# Altium PCB WG-JW-MB V1.0.PcbDoc
Units mil, origin at the board's own origin, x right, y up, seen from the top; angles counter-clockwise.
Board outline 3784.52 x 3519.17 mil, 4 copper layers (Top Layer, VCC, GND, Bottom Layer); 88 components, 55 nets, 282 pads, 98 vias.
Unrouted connection lines stored in the file: 1.
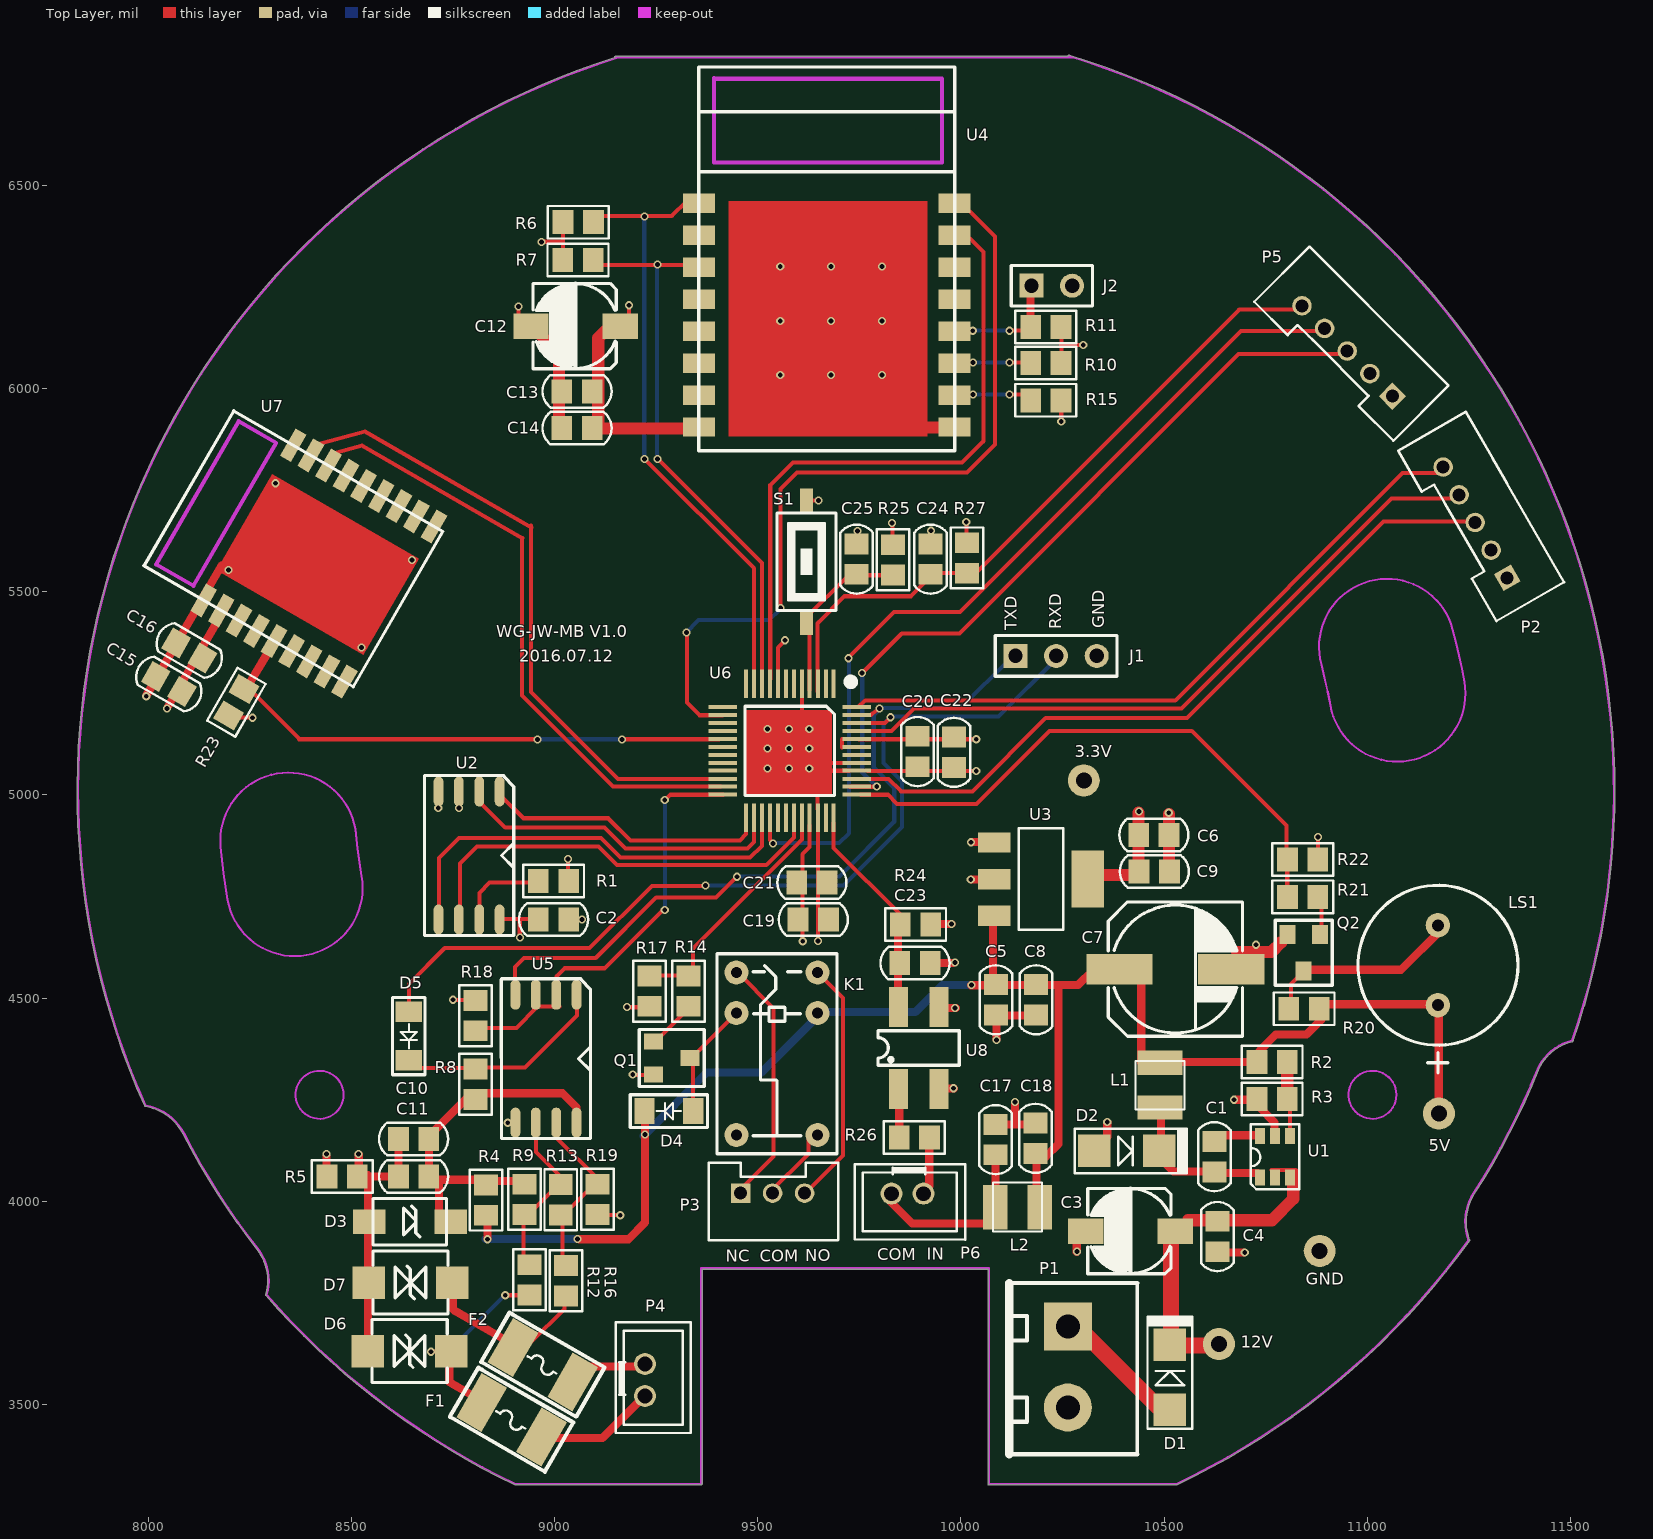
[diagram p0: Top Layer view]
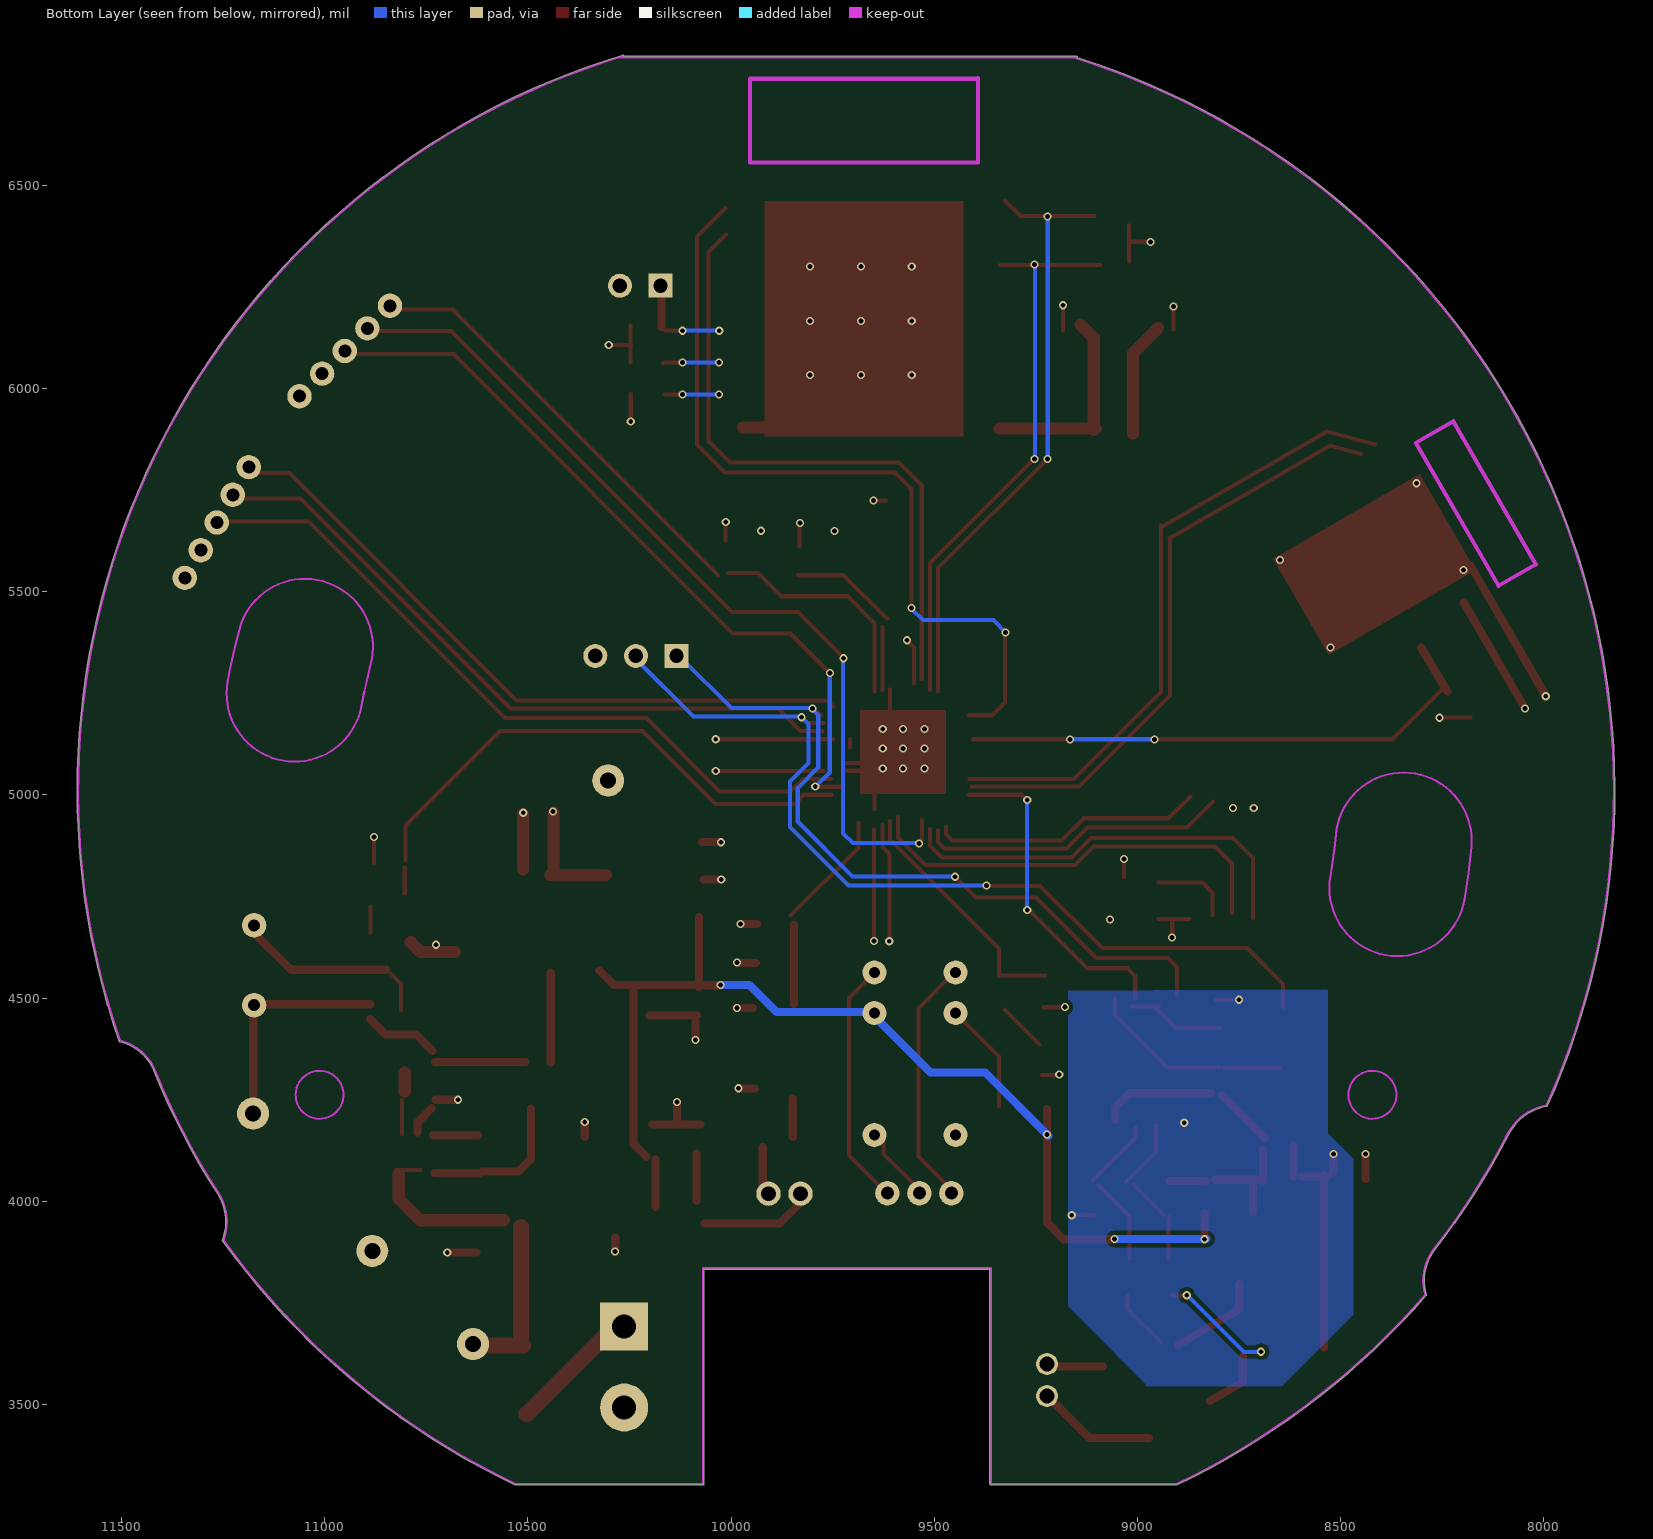
[diagram p1: Bottom Layer view, seen from below]
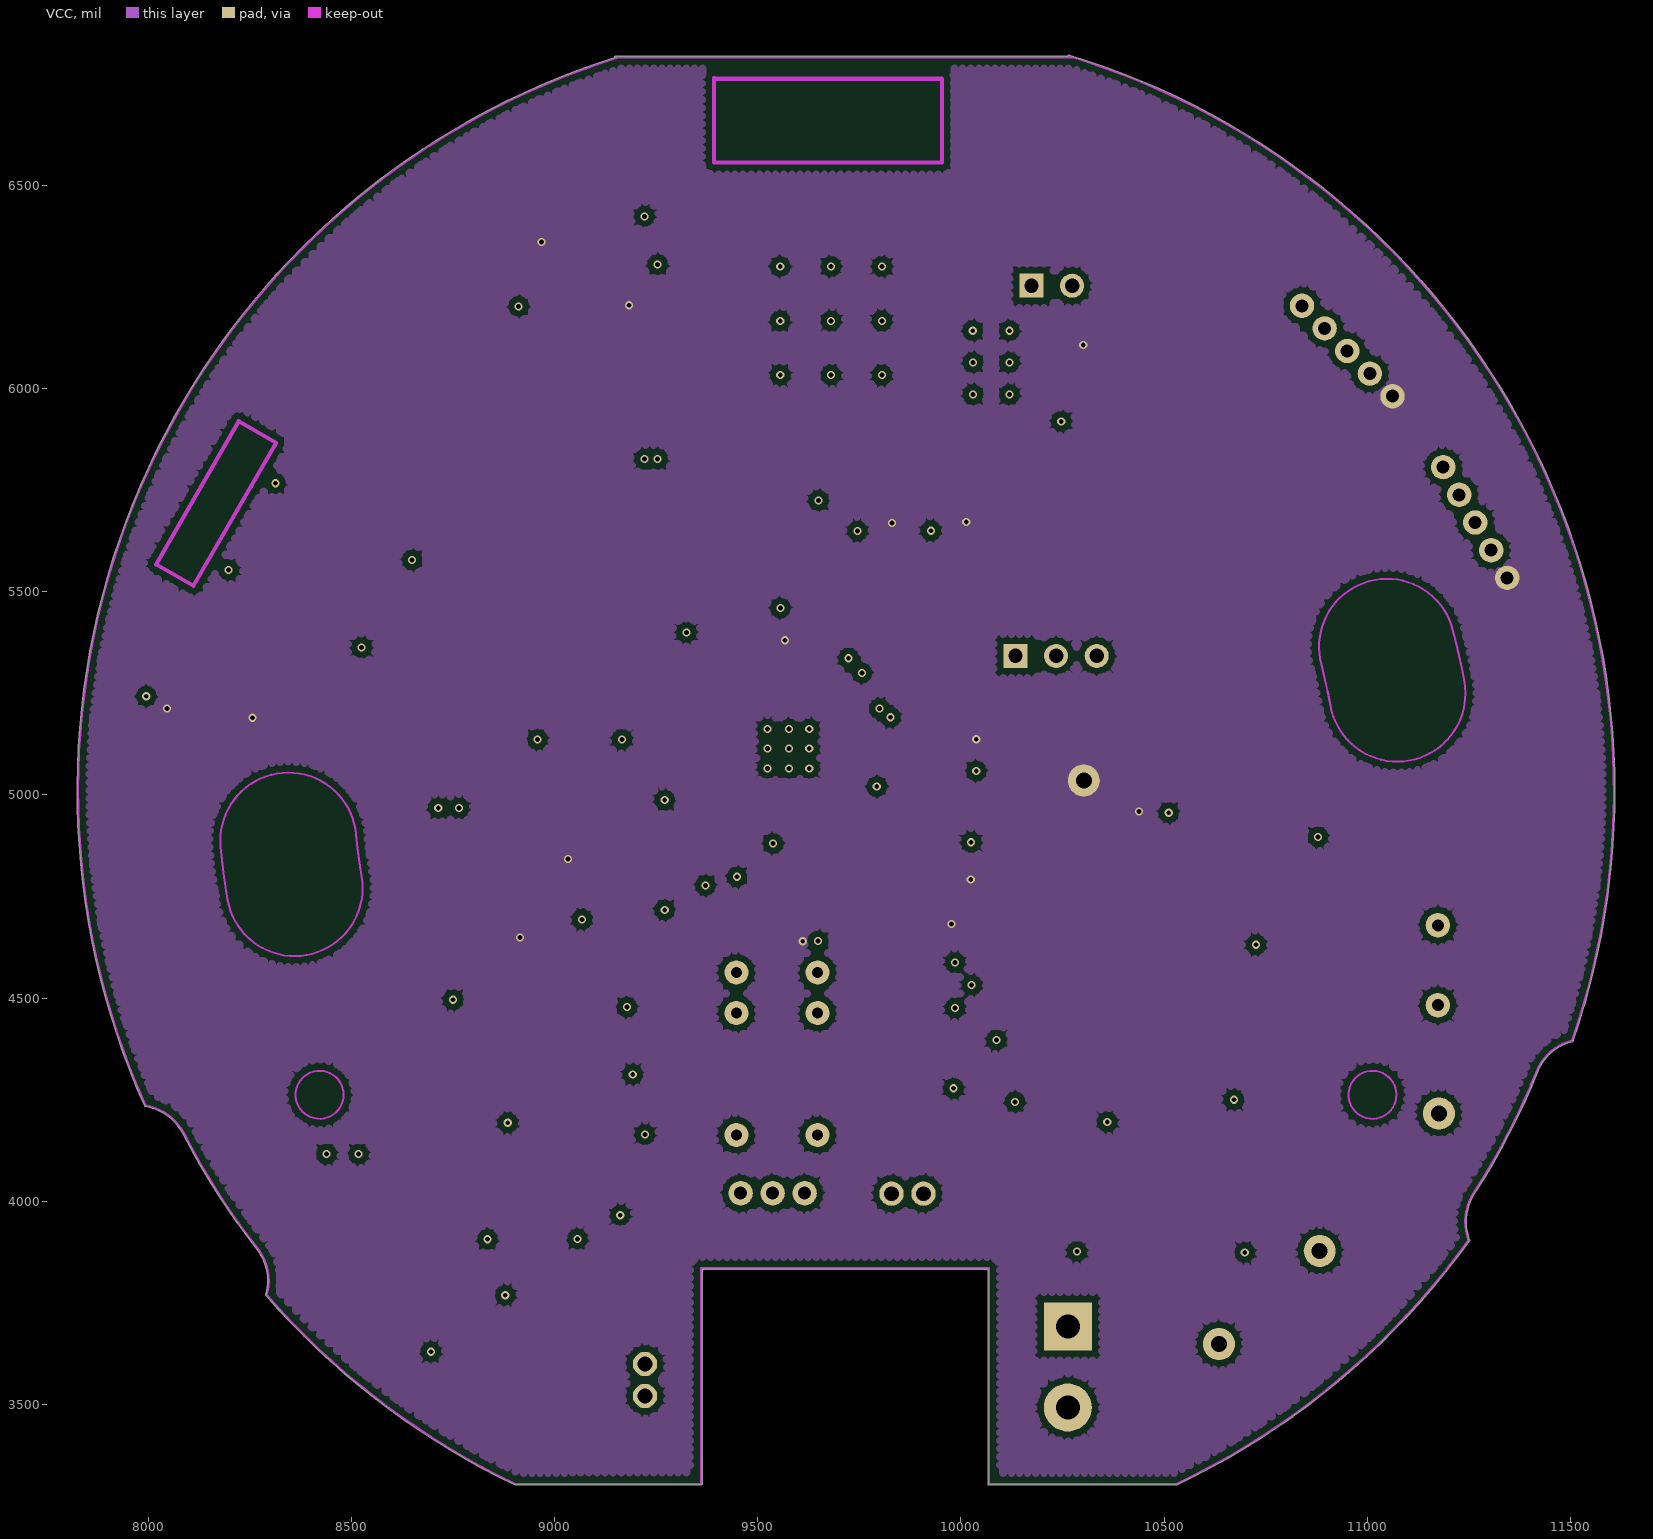
[diagram p2: VCC]
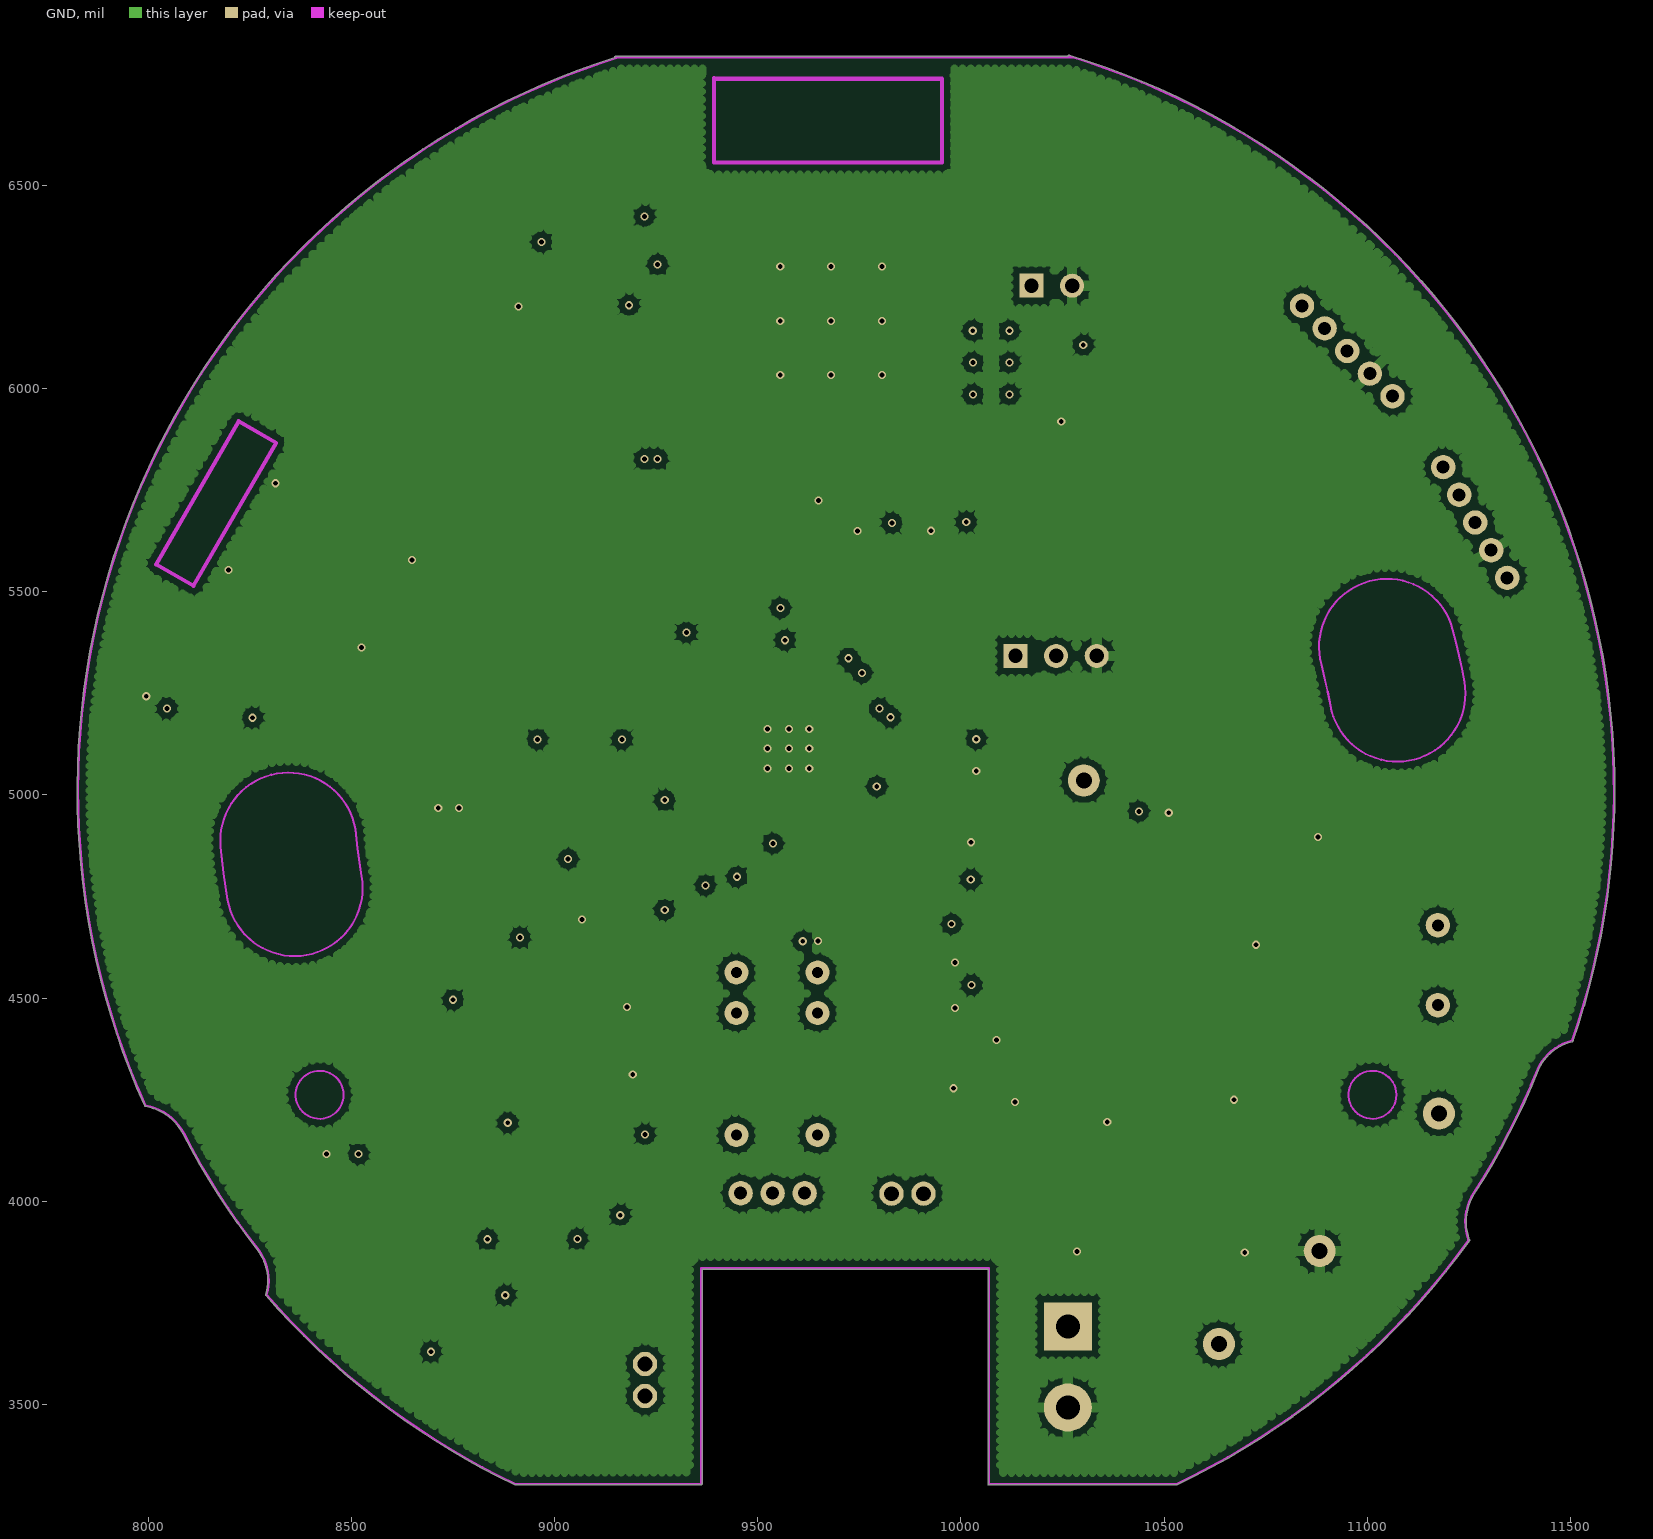
[diagram p3: GND]

## Layer stack, top to bottom
Top Layer: signal copper 1.4
Dielectric: core 12.6, FR-4, Dk 4.8
VCC: signal copper 1.4
Dielectric: prepreg 12.6, FR-4, Dk 4.8
GND: signal copper 1.4
Dielectric: core 12.6, FR-4, Dk 4.8
Bottom Layer: signal copper 1.4

## Board outline
8270.48,3877.31 ccw(c9717.08,5009.79) 8270.51,3877.27 8270.48,3877.31 cw(c8170.37,3805.04) 8293.84,3805.04 cw(c8170.37,3805.04) 8288.84,3770.24 ccw(c8291.25,3769.54) 8289.35,3767.89 ccw(c9717.08,5009.79) 8902.77,3301.68 ccw(c8903.85,3303.95) 8903.86,3301.44 9360.68,3302.48 ccw(c9360.67,3305) 9363.18,3305 9363.18,3832.64 10066.82,3832.64 10066.82,3303.95 ccw(c10069.33,3303.95) 10069.67,3301.46 ccw(c10070,3303.95) 10070,3301.44 10530.31,3301.44 ccw(c10530.31,3303.95) 10531.39,3301.68 ccw(c9717.08,5009.79) 11251.34,3902.19 ccw(c11249.3,3903.66) 11251.81,3903.66 ccw(c11249.3,3903.66) 11251.65,3904.57 cw(c11372.12,3949.28) 11263.92,4018.61 ccw(c9717.08,5009.79) 11421.14,4323.24 ccw(c9717.08,5009.79) 11421.16,4323.28 11421.14,4323.24 cw(c11533.78,4272.68) 11504.68,4392.67 ccw(c11504.08,4395.11) 11506.46,4394.29 ccw(c9717.08,5009.79) 11609.36,5009.79 ccw(c9717.08,5009.79) 10266.67,6820.5 ccw(c10265.94,6818.09) 10263.49,6817.51 9161.38,6817.51 ccw(c9159.84,6815.53) 9159.1,6817.93 ccw(c9717.08,5009.79) 9157.75,6817.51 9150,6817.51 ccw(c9150,6815) 9147.57,6814.33 ccw(c9717.08,5009.79) 7990.74,4234.88 ccw(c7993.04,4235.91) 7992.64,4233.43 ccw(c7971.13,4106.74) 7992.62,4233.43 7992.64,4233.43 cw(c7971.13,4106.74) 8085.26,4165.79 cw(c7971.13,4106.74) 8085.27,4165.77 ccw(c9717.08,5009.79)

## Design rules (kind name [scope] priority, off if disabled: settings)
Clearance [All] p1: gap=10
PolygonConnect isP7-1 [InComponent('P7')and InNet('VDD33')] p1: connectstyle=Relief reliefconductorwidth=25 reliefentries=4 polygonreliefangle="90 Angle"
PolygonConnect IsGndPin [IsPadHoleValid AND InNet('GND')] p2: connectstyle=Relief reliefconductorwidth=25 reliefentries=4 polygonreliefangle="90 Angle"
PolygonConnect IsVia [IsVia] p3: connectstyle=Direct reliefconductorwidth=10 reliefentries=4 polygonreliefangle="90 Angle"
PolygonConnect [All] p4: connectstyle=Direct reliefconductorwidth=20 reliefentries=4 polygonreliefangle="90 Angle"
RoutingVias [All] p1: holewidth=12 width=20 viastyle="Through Hole" minholewidth=12 minwidth=20 maxholewidth=12 maxwidth=20
SilkToSilkClearance [All] p1: silktosilkclearance=0
SilkscreenOverComponentPads [IsPad] p1: minsilkscreentomaskgap=0
SolderMaskExpansion [All] p1: expansion=4
Width [All] p1: maxlimit=100 minlimit=10 preferedwidth=10 midlayer1_maxwidth=10 midlayer2_maxwidth=10 minimp=50.000000 maximp=50.000000 favimp=50.000000
26 further rules are at their usual default settings.

## Components (designator, comment, footprint, x,y, rotation, side; value= is the part's Value field where it differs from the comment)
3.3V "5VOUT" TestPoint 10302.36,5035.43 r180 top
5V "5VOUT" TestPoint 11176.38,4215.75 r90 top
12V "5VOUT" TestPoint 10635.04,3648.43 r180 top
C1 "22nF" "0805 - C" 10623.62,4109.45 r90 top
C2 "0.1uF" "0805 - C" 8997.24,4693.31 r180 top
C3 "47uF/16V" smd_ec_d5.2 10417.32,3926.38 r90 top
C4 "0.1uF" "0805 - C" 10631.1,3912.99 r90 top
C5 "0.1uF" "0805 - C" 10085.83,4495.67 r90 top
C6 "0.1uF" "0805 - C" 10474.8,4901.57 r180 top
C7 "220uF/25V" smd_ec_d8 10527.95,4571.26 r270 top
C8 "10uF" "0805 - C" 10185.04,4495.67 r270 top
C9 "10uF" "0805 - C" 10475.98,4811.42 r0 top
C10 "22uF" "0805 - C" 8652.76,4153.15 r180 top
C11 "0.1uF" "0805 - C" 8652.76,4061.02 r180 top
C12 "47uF" SMD_EC_D5.2 9051.57,6153.94 r90 top
C13 "1uF" "0805 - C" 9055.12,5993.31 r180 top
C14 "10nF" "0805 - C" 9055.12,5902.76 r0 top
C15 "10uF" "0805 - C" 8050.39,5272.83 r150 top
C16 "0.1uF" "0805 - C" 8100.79,5355.12 r150 top
C17 "10uF" "0805 - C" 10085.43,4151.57 r90 top
C18 "10uF" "0805 - C" 10183.46,4154.72 r90 top
C19 "10uF" "0805 - C" 9636.61,4692.91 r0 top
C20 "10uF" "0805 - C" 9893.31,5106.69 r270 top
C21 "0.1uF" "0805 - C" 9633.2,4783.97 r180 top
C22 "0.1uF" "0805 - C" 9982.68,5104.72 r90 top
C23 "0.1uF" "0805 - C" 9887.01,4585.83 r180 top
C24 "1uF" "0805 - C" 9925.2,5580.31 r270 top
C25 "0.1uF" "0805 - C" 9743.31,5580.31 r270 top
D1 "SS14" SMD_DIODE_SMA 10514.17,3577.56 r90 top
D2 "SS14" SMD_DIODE_SMA 10418.11,4123.62 r0 top
D3 "SMAJ6.0A" SMAJ_A 8644.09,3950.39 r0 top
D4 "1N4148" 1n4148 9286.22,4221.65 r180 top
D5 "1N4148" 1n4148 8640.94,4411.42 r270 top
D6 "SMBJ5.0CA" SMBJ_CA 8642.91,3631.1 r180 top
D7 "SMBJ5.0CA" SMBJ_CA 8645.28,3799.61 r0 top
F1 "FUSE/100mA/30V" SMD_POLYSWITCH 8894.09,3462.2 r330 top
F2 "FUSE/100mA/30V" SMD_POLYSWITCH 8970.87,3597.64 r330 top
GND "5VOUT" TestPoint 10883.07,3877.56 r180 top
J1 "Header 3" HDR1X3 10134.25,5342.13 r0 top
J2 "Jumper" HDR1X2 10173.62,6253.15 r0 top
K1 "HFD41" HFD23 9547.24,4362.99 r0 top
L1 "4.7uH" SMD_L_3015 10490.16,4285.43 r90 top
L2 "4.7uH" SMD_L_3015 10139.37,3985.43 r0 top
LS1 "Bell" BZ_D12 11174.02,4580.71 r90 top
P1 "Header 2" CON2-5.08 10262.99,3692.13 r270 top
P2 "Header 5" CN_1X5_P200 11265.75,5670.47 r300 top
P3 "Header 3" CN_1X3_P200 9537.8,3979.92 r180 top
P4 "Header 2" CN_1X2_P200#1 9222.83,3559.45 r270 top
P5 "Header 5" CN_1X5_P200 10950.79,6092.52 r315 top
P6 "Header 2" CN_1X2_P200#2 9868.11,4018.11 r180 top
Q1 "NPN" SOT23 9288.19,4352.36 r270 top
Q2 "NPN" SOT23 10843.7,4611.42 r180 top
R1 "10K" "0805 - R" 8997.24,4787.8 r0 top
R2 "150K" "0805 - R" 10765.75,4342.52 r180 top
R3 "28.7K" "0805 - R" 10765.75,4251.18 r0 top
R4 "0R" "0805 - R" 8831.5,4002.76 r270 top
R5 "0R" "0805 - R" 8476.77,4061.02 r180 top
R6 "10K" "0805 - R" 9057.87,6409.45 r180 top
R7 "10K" "0805 - R" 9057.48,6316.14 r180 top
R8 "10K" "0805 - R" 8805.12,4287.8 r270 top
R9 "10K" "0805 - R" 8925.98,4004.33 r90 top
R10 "10K" "0805 - R" 10209.06,6062.99 r0 top
R11 "10K" "0805 - R" 10209.06,6151.97 r0 top
R12 "10R" "0805 - R" 8938.58,3806.3 r90 top
R13 "10K" "0805 - R" 9015.01,4003.74 r90 top
R14 "4.7K" "0805 - R" 9329.92,4516.93 r270 top
R15 "10K" "0805 - R" 10209.06,5971.26 r180 top
R16 "10R" "0805 - R" 9028.35,3804.33 r90 top
R17 "10K" "0805 - R" 9233.07,4516.93 r270 top
R18 "10K" "0805 - R" 8805.12,4456.69 r270 top
R19 "10K" "0805 - R" 9105.12,4004.33 r90 top
R20 "10K" "0805 - R" 10844.49,4473.62 r180 top
R21 "1K" "0805 - R" 10840.94,4749.21 r180 top
R22 "4.7K" "0805 - R" 10840.94,4840.55 r180 top
R23 "10K" "0805 - R" 8216.54,5227.95 r240 top
R24 "10K" "0805 - R" 9888.19,4681.1 r180 top
R25 "10K" "0805 - R" 9833.07,5578.35 r270 top
R26 "1K" "0805 - R" 9885.43,4156.69 r0 top
R27 "10K" "0805 - R" 10015.35,5583.07 r270 top
S1 "SW-PB" SW_SMD_2P 9619.69,5573.62 r90 top
U1 "ACT4088" SOT23-6 10772.83,4109.45 r0 top
U2 "W25Q16" SOIC8-50X204 8789.37,4850.79 r180 top
U3 "LM1117-3.3" SOT223 10222.05,4792.52 r270 top
U4 "ESP-12F" WIFI-ESP 9669.68,5846.85 r0 top locked
U5 "TP8485" SOIC8-50X204 8978.74,4350.79 r180 top
U6 "LPC1125FBD48/333" TQFP48 9578.74,5108.27 r270 top locked
U7 "RF-BM-S02" RF-BM-S02 8136.22,5478.74 r60 top
U8 "EL357N" SOP4 9846.06,4276.38 r90 top

## Footprints (in the part's own frame and the unit in brackets; to place one, negate y for a bottom-side part, rotate by r counter-clockwise, add the part's x,y. Pads: shape width x height; smd on the part's side, far side on the other; paste and mask are expansions set on the pad)
1n4148 [mil] "1N4148"
  rect 50x64.2 smd: 1(-54.7,0) 2(64.9,0)
  silkscreen extent -90,-40 100,40
"0805 - C" [mm] "SMD_CAP_0805"
  rect 1.3x1.5 smd: 1(-0.95,0) 2(0.95,0)
  silkscreen extent -2.16,-1.02 2.16,1.02
"0805 - R" [mm]
  rect 1.3x1.5 smd: 1(-0.95,0) 2(0.95,0)
  silkscreen extent -1.91,-1.02 1.91,1.02
BZ_D12 [mil]
  round 60 hole 29.53: 1(-98.43,0) 2(98.43,0)
  silkscreen extent -265,-197 197,197
CN_1X2_P200#1 [mil]
  round 54 / inner round 60 / far side round 54 hole 36: 1(38.99,-0.51) 2(-39.75,-0.51)
  silkscreen extent -143,-73 130,113
CN_1X2_P200#2 [mil]
  round 54 / inner round 60 / far side round 60 hole 36: 1(38.99,-0.51) 2(-39.75,-0.51)
  silkscreen extent -143,-73 130,113
CN_1X3_P200 [mil]
  rect 48x48 / inner round 60 / far side round 60 hole 32: 1(80,-39.69)
  round 48 / inner round 60 / far side round 60 hole 32: 2(1.26,-39.69) 3(-77.48,-39.69)
  silkscreen extent -160,-115 159,76
CN_1X5_P200 [mil]
  rect 48x48 / inner round 60 / far side round 60 hole 32: 1(157.48,0)
  round 48 / inner round 60 / far side round 60 hole 32: 2(78.74,0) 3(0,0) 4(-78.74,0) 5(-157.48,0)
  silkscreen extent -248,-76 236,116
CON2-5.08 [mm]
  rect 3x3 hole 1.5: 1(0,0)
  round 3 hole 1.5: 2(5.08,0)
  silkscreen extent -2.7,-3.66 8,4.34
HDR1X2 [mm] "Connector; Header; 2 Position"
  rect 1.5x1.5 hole 0.9: 1(0,0)
  round 1.5 hole 0.9: 2(2.54,0)
  silkscreen extent -1.27,-1.27 3.81,1.27
HDR1X3 [mm] "Connector; Header; 3 Position"
  rect 1.5x1.5 hole 0.9: 1(0,0)
  round 1.5 hole 0.9: 2(2.54,0) 3(5.08,0)
  silkscreen extent -1.27,-1.27 6.35,1.27
HFD23 [mm]
  round 1.5 hole 0.7: 1(-2.54,-5.08) 1(2.54,-5.08) 2(-2.54,5.08) 3(2.54,5.08) 4(-2.54,2.54) 5(2.54,2.54)
  silkscreen extent -3.75,-6.25 3.75,6.25
RF-BM-S02 [mm]
  rect 2x0.8 smd: 1(0,0) 2(0,-1.27) 3(0,-2.54) 4(0,-3.81) 5(0,-5.08) 6(0,-6.35) 7(0,-7.62) 8(0,-8.89) 9(0,-10.16) 10(11.2,-10.16) 11(11.2,-8.89) 12(11.2,-7.62) 13(11.2,-6.35) 14(11.2,-5.08) 15(11.2,-3.81) 16(11.2,-2.54) 17(11.2,-1.27) 18(11.2,0)
  silkscreen extent 0,-10.8 11.2,4.35
SMAJ_A [mil] "SMAJ_A"
  rect 80x60 smd: 1(-101,-1) 2(100,-1)
  silkscreen extent -91,-58 90,56
SMBJ_CA [mil] "SMBJ_CA"
  rect 80x80 smd: 1(-102.5,0) 2(102.5,0)
  silkscreen extent -93,-78 93,78
SMD_DIODE_SMA [mil] "SMD_DIODE_SMA"
  rect 80x80 smd: 1(-90.5,0) 2(69.5,0)
  silkscreen extent -138,-55 140,55
smd_ec_d5.2 [mm]
  rect 1.6x2.2 smd: 1(0,-2.794) 2(0,2.794)
  silkscreen extent -2.67,-2.54 2.67,2.67
SMD_EC_D5.2 [mm]
  rect 1.6x2.2 smd: 1(0,-2.794) 2(0,2.794)
  silkscreen extent -2.67,-2.54 2.67,2.67
smd_ec_d8 [mm]
  rect 1.9x4.15 smd: 1(0,-3.5) 2(0,3.5)
  silkscreen extent -4.2,-4.2 4.2,4.2
SMD_L_3015 [mil] "SMD_3015"
  rect 60x110 smd: 1(-55,0) 2(55,0)
  silkscreen extent -60,-60 60,60
SMD_POLYSWITCH [mil]
  rect 72x126 smd: 1(-85,0) 2(85,0)
  silkscreen extent -135,-70 135,70
SOIC8-50X204 [mm] "SOIC8-50X204"
  oval 0.61x1.88 smd: 1(-1.91,-4) 2(-0.64,-4) 3(0.64,-4) 4(1.91,-4) 5(1.91,4) 6(0.64,4) 7(-0.64,4) 8(-1.91,4)
  silkscreen extent -2.79,-5 2.79,5
SOP4 [mm]
  rect 2.5x1.2 smd: 1(0,0) 2(-0.01,-2.53) 3(5.12,-2.54) 4(5.12,0)
  silkscreen extent 1.48,-3.81 3.64,1.27
SOT23 [mm] "SOT23"
  rect 1x1.2 smd: 1(0,1.141) 2(-1.021,-1.141) 3(1.021,-1.14)
  silkscreen extent -1.78,-2.03 1.78,2.03
SOT23-6 [mil] "SOT23-6"
  rect 25x40 smd: 1(-37,-51) 2(0,-51) 3(37,-51) 4(37,51) 5(0,51) 6(-37,51)
  silkscreen extent -60,-80 60,80
SOT223 [mil] "SOT223"
  rect 50x80 smd: 1(-90.2,-139.8) 2(0,-139.8) 3(90.2,-139.8)
  rect 140x80 smd: 4(0,90)
  silkscreen extent -125,-80 125,30
SW_SMD_2P [mil] "SMD_SW_2P"
  rect 60x32 smd: 1(150,0) 2(-150,0)
  silkscreen extent -120,-73 120,73
TestPoint [mm]
  round 2 hole 1: 1(0,0)
TQFP48 [mil] "TQFP48"
  rect 70.1x9.8 smd: 1(-165,107.9) 2(-165,89) 3(-165,68.9) 4(-165,48.8) 5(-165,29.9) 6(-165,9.8) 7(-165,-9.8) 8(-165,-29.1) 9(-165,-48.8) 10(-165,-68.9) 11(-165,-88.2) 12(-165,-107.9) 25(165,-107.9) 26(165,-88.2) 27(165,-68.9) 28(165,-48.8) 29(165,-29.1) 30(165,-9.8) 31(165,9.8) 32(165,29.9) 33(165,48.8) 34(165,68.9) 35(165,89) 36(165,107.9)
  rect 9.8x70.1 smd: 13(-107.9,-165) 14(-88.2,-165) 15(-68.9,-165) 16(-48.8,-165) 17(-29.1,-165) 18(-9.8,-165) 19(9.8,-165) 20(29.9,-165) 21(48.8,-165) 22(68.9,-165) 23(88.2,-165) 24(107.9,-165) 37(107.9,165) 38(88.2,165) 39(68.9,165) 40(48.8,165) 41(29.9,165) 42(9.8,165) 43(-9.8,165) 44(-29.1,165) 45(-48.8,165) 46(-68.9,165) 47(-88.2,165) 48(-107.9,165)
  silkscreen extent -184,-110 110,164
WIFI-ESP [mm]
  rect 2x1.2 smd: 1(-8,15.48) 2(-8,13.48) 3(-8,11.48) 4(-8,9.48) 5(-8,7.48) 6(-8,5.48) 7(-8,3.48) 8(-8,1.48) 15(8,1.48) 16(8,3.48) 17(8,5.48) 18(8,7.48) 19(8,9.48) 20(8,11.48) 21(8,13.48) 22(8,15.48)
  silkscreen extent -8,0 8,24

## Part data
3.3V 5V 12V GND: library part TESTPOINT
C1 C2 C4 C5 C6 C11 C14 C16 C21 C22 C23 C24 C25: library part Cap, "Capacitor"
C3 C7 C8 C9 C10 C12 C13 C15 C17 C18 C19 C20: library part "Cap Pol1", "Polarized Capacitor (Radial)"
D1 D2 D4 D5: library part Diode, "Default Diode"
D3: library part "D Schottky", "Schottky Diode"
D6 D7: library part TVS
F1 F2: library part "Fuse 2", "Fuse"
J1 P3: "Header, 3-Pin"
J2: "Jumper Wire"
K1: library part Relay-SPDT, "Single-Pole Dual-Throw Relay"
L1 L2: library part Inductor, "Inductor"
LS1: "Electrical Bell"
P1 P4 P6: "Header, 2-Pin"
P2 P5: "Header, 5-Pin"
Q1 Q2: "NPN Bipolar Transistor"
R1: library part Res3, "Resistor"
R2 R3 R4 R5 R6 R7 R8 R9 R10 R11 R12 R13 R14 R15 R16 R17 R18 R19 R20 R21 R22 R23 R24 R25 R26 R27: library part Res1, "Resistor"
S1: "Switch"
U2: library part MX25Lxx
U3: library part LM1117_1
U8: library part Optoisolator1, "4-Pin Phototransistor Optocoupler"

## Via types
v1: diameter 20, hole 12, Top Layer to Bottom Layer, 98 vias

## Nets (pads, with @x,y where several pads share a name; then routed paths per layer and width w, separated by ;. In a path a pad name is that pad's centre, name@x,y a point inside that pad or via, vN(x,y) a via of type N, cw(c..) or ccw(c..) an arc to the next point about the centre after c; other vN are vias at no path point)
BEEP: R21.2 R22.2 U6.37 | length 1378.2
  Top Layer w10: U6.37@9752.36,5000.39 9820.08,5000.39 9842.91,4977.56 10037.79,4977.56 10217.72,5157.48 10568.11,5157.48 10801.18,4924.41 R22.2@10801.18,4839.76 ; R21.2@10803.15,4757.48 R22.2@10803.15,4821.65
BLE_RST: R23.1 U6.17 U7.5 | length 1322.4
  Top Layer w10: R23.1@8252.75,5256.69 8371.65,5137.8 ; 8370.47,5137.01 v1@8952.76,5137.01 ; v1@9164.96,5137.01 U6.17@9404.72,5137.01
  Top Layer w20: R23.1@8237.01,5254.33 U7.5@8301.18,5362.2
  Bottom Layer w10: v1@8958.66,5137.01 v1@9165.35,5137.01
  other v1: 8957.48,5136.61 9165.75,5136.61
BLE_RX: U6.22 U7.17 | length 1566.2
  Top Layer w10: U7.17@8414.69,5862.64 8533.26,5894.41 8943.43,5657.6 ; 8942.13,5663.39 8942.13,5253.54 9156.2,5039.47 U6.22@9413.48,5039.47
BLE_TX: U6.23 U7.16 | length 1502.9
  Top Layer w10: U7.16@8450.03,5839.01 8526.29,5859.44 8920.4,5631.9 ; 8919.68,5631.89 8919.69,5244.09 9143.6,5020.18 U6.23@9407.97,5020.18
BOOT: C25.2 R25.2 S1.2 U6.4 | length 417.5
  Top Layer w10: S1.2@9616.34,5434.08 9722.81,5540.55 R25.2@9834.65,5540.55 ; U6.4@9627.17,5258.27 S1.2@9627.17,5413.39
COM1: K1.1 P3.2 | length 178.2
  Top Layer w10: P3.2@9529.13,4020.87 9624.8,4116.54 K1.1@9624.8,4159.45
FLH_NSCS: U2.1 U6.25 | length 671.4
  Top Layer w10: U2.1@8869.68,4995.67 8922.83,4942.52 9131.89,4942.52 9186.22,4888.19 9455.91,4888.19 9471.26,4903.54 U6.25@9471.26,4922.44
GND: C2.1 C3.2 C4.1 C5.1 C6.1 C7.2 C8.2 C9.2 C12.2 C13.2 C14.1 C15.2 C16.2 C17.2 C18.2 C19.2 C20.2 C21.1 C22.1 C23.1 C24.1 C25.1 D2.1 GND.1 J1.3 J2.2 P1.2 P2.2 P5.2 Q1.3 Q2.3 R3.1 R5.2 R15.1 R17.2 R22.1 S1.1 U1.5 U2.3 U2.4 U3.1 U4.15 U6.5 U6.34 U6.40 U6.41 U7.1 U8.2 U8.3 | length 2891.6
  Top Layer w10: C12.2@8911.42,6145.28 v1(8911.42,6202.36) ; v1@9178.35,4477.24 R17.2@9230.58,4477.24 ; v1@9192.91,4311.1 Q1.3@9234.91,4311.1 ; 9608.66,5198.82 U6.5@9608.66,5259.05 ; S1.1@9618.5,5724.41 v1@9650.39,5724.41 ; U6.34@9647.24,4965.75 9647.24,5018.08 ; v1@9648.03,4646.06 U6.34@9648.03,4914.96 ; 9668.92,5078.35 U6.41@9721.26,5078.35 ; 9669.68,5059.45 U6.40@9725.59,5059.45 ; U6.40@9771.26,5059.05 v1@10039.37,5059.06 ; v1@10246.85,5920.87 R15.1@10246.85,5986.22 ; R22.1@10878.35,4832.68 v1@10878.35,4896.85
  Top Layer w20: v1@7994.69,5244.07 8179.81,5564.71 ; R5.2@8438.58,4054.72 v1@8438.58,4110.63 ; C23.1@9938.19,4586.22 v1@9979.92,4586.22 ; U8.2@9940.94,4277.17 v1@9982.68,4277.17 ; U8.3@9946.46,4475.59 v1@9988.19,4475.59 ; v1@10029.92,4883.86 U3.1@10071.65,4883.86 ; C17.2@10075.59,4188.58 C18.2@10193.31,4188.58 ; C5.1@10083.46,4457.09 C8.2@10201.18,4457.09 ; v1@10087.4,4398.82 C5.1@10087.4,4442.13 ; 10132.68,4196.85 v1@10132.68,4240.16 ; v1@10285.04,3875.2 C3.2@10285.04,3910.24 ; D2.1@10360.24,4158.66 v1@10360.24,4193.7 ; C4.1@10626.38,3873.62 v1@10696.06,3873.62 ; v1@10678.22,4249.74 R3.1@10727.78,4249.74 ; R3.1@10737.01,4228.74 10772.05,4193.7 U1.5@10772.05,4169.29
  Top Layer w30: C12.2@8948.82,6148.82 9010.63,6087.01 C14.1@9010.63,5889.37 ; 9868.9,5903.94 U4.15@9970.47,5903.94 ; C9.2@10511.81,4816.14 v1@10511.81,4952.76 ; 10679.13,4613.39 10764.57,4613.39 Q2.3@10788.58,4637.4
  other v1: 10698.43,3874.02 10285.43,3875.98 8438.58,4116.14 10360.24,4194.88 10133.07,4244.49 10671.65,4249.61 9981.89,4277.95 9192.13,4312.2 10087.8,4396.46 9985.83,4475.2 9177.95,4477.56 9985.04,4587.4 10726.38,4631.1 9648.43,4640.16 9067.32,4693.7 10025.2,4883.46 10878.74,4896.46 10511.42,4955.91 8713.39,4967.72 8764.96,4967.72 10037.8,5058.66 9523.62,5065.35 9576.77,5065.35 9626.77,5065.35 9523.62,5113.78 9576.77,5113.78 9626.77,5113.78 9523.62,5162.2 9576.77,5162.2 9626.77,5162.2 7994.88,5242.91 8524.8,5362.6 8197.64,5553.54 8649.21,5578.35 9745.67,5649.21 9925.98,5650 9649.61,5724.41 8312.6,5766.93 10246.85,5919.29 9555.12,6033.07 9680.31,6033.07 9805.51,6033.07 9555.12,6166.73 9680.31,6166.73 9805.51,6166.73 9555.12,6300.39 9680.31,6300.39 9805.51,6300.39
GPIO0: J2.1 R11.1 U4.18 | length 223.5
  Top Layer w10: v1(10119.29,6142.52) R11.1@10162.2,6142.52
  Top Layer w20: J2.1@10170.08,6247.64 10171.65,6246.06 R11.1
  Bottom Layer w10: v1(10029.13,6142.52) v1@10113.39,6142.52
GPIO2: R10.1 U4.17 | length 138.8
  Top Layer w10: v1(10119.29,6063.78) 10165.35,6063.78 R10.1@10167.32,6061.81
  Bottom Layer w10: v1(10029.53,6063.78) 10118.9,6063.78 v1@10119.29,6064.17
GPIO15: R15.2 U4.16 | length 131.8
  Top Layer w10: v1(10119.29,5985.04) R15.2@10162.6,5985.04
  Bottom Layer w10: v1(10029.53,5985.04) 10116.93,5985.04 v1@10117.72,5985.83
IN_SIG1: C23.2 R24.2 U6.36 U8.4 | length 493.2
  Top Layer w10: U6.36@9686.61,4931.1 9686.61,4869.69 R24.2@9853.54,4702.76
  Top Layer w20: U8.4@9845.28,4485.43 R24.2@9845.28,4681.1
LED_B: P2.5 U6.48 | length 1683.6
  Top Layer w10: U6.48@9748.43,5217.32 9763.39,5232.29 10527.55,5232.28 11087.01,5791.73 P2.5@11194.09,5791.73
LED_G: P2.4 U6.45 | length 1689.6
  Top Layer w10: U6.45@9775.2,5157.09 9829.53,5157.09 9885.04,5212.6 10542.51,5212.6 11059.85,5729.92 P2.4@11227.56,5729.92
LED_R: P2.3 U6.39 | length 1774.8
  Top Layer w10: U6.39@9753.94,5039.37 9822.05,5039.37 9850.79,5010.63 ; 9852.36,5008.66 10027.95,5008.66 10208.67,5189.37 10556.29,5189.37 11039.77,5672.84 P2.3@11243.31,5672.83
NC1: K1.2 P3.1 | length 593.2
  Top Layer w10: K1.2@9452.36,4561.02 9538.58,4474.8 9538.58,4109.84 P3.1@9463.39,4034.65
NetC1_1: C1.1 D2.2 L1.1 U1.1 | length 369.2
  Top Layer w20: L1.1@10492.13,4228.35 10492.13,4103.94 10523.23,4072.83 C1.1@10612.6,4072.83 ; C1.1@10618.5,4068.9 U1.1@10729.92,4068.9
NetC1_2: C1.2 U1.6 | length 111.4
  Top Layer w20: C1.2@10622.44,4162.2 U1.6@10733.86,4162.2
NetD1_1: D1.1 P1.1 | length 293.4
  Top Layer w40: P1.1@10295.28,3683.46 D1.1@10502.76,3475.98
NetD4_1: D4.1 K1.4 Q1.1 | length 243.6
  Top Layer w10: D4.1@9340.16,4234.25 Q1.1@9340.16,4355.91 ; Q1.1@9344.09,4359.84 K1.4@9430.32,4446.06
NetD5_2: D5.2 R8.1 U5.1 | length 492.2
  Top Layer w10: D5.2@8646.85,4327.56 R8.1@8787.8,4327.56 ; R8.1@8798.43,4329.13 8927.16,4329.13 9054.72,4456.69 U5.1@9054.72,4498.82
NetD6_1: D6.1 F1.1 R12.1 | length 457.2
  Top Layer w10: v1@8694.88,3629.53 D6.1@8727.95,3629.53 ; v1@8881.1,3768.5 R12.1@8914.17,3768.5
  Top Layer w20: 8740.58,3554.72 D6.1@8740.58,3617.2 ; 8746.7,3550.84 F1.1@8821.02,3507.93
  Bottom Layer w10: v1@8695.67,3628.73 8737.4,3628.73 v1@8879.53,3770.87
  other v1: 8695.28,3629.53 8878.35,3768.5
NetD7_2: D7.2 F2.1 R16.1 | length 382.1
  Top Layer w10: F2.1@8942.22,3653.24 9024.02,3735.04 R16.1@9024.02,3768.11
  Top Layer w20: 8749.18,3735.16 D7.2@8749.18,3797.64 ; 8752.18,3731.55 F2.1@8900.16,3646.12
NetLS1_2: LS1.2 Q2.1 R20.2 | length 468.6
  Top Layer w10: R20.2@10812.6,4470.87 10812.6,4535.04 Q2.1@10836.61,4559.06
  Top Layer w20: Q2.1@10849.61,4569.69 11083.07,4569.69 LS1.2@11179.92,4666.54
NetP6_2: P6.2 R26.2 | length 94.9
  Top Layer w20: P6.2@9922.05,4037.8 R26.2@9922.05,4132.68
NetQ1_2: Q1.2 R14.2 | length 121.9
  Top Layer w10: Q1.2@9240.55,4385.43 R14.2@9326.77,4471.65
NetQ2_2: Q2.2 R21.1 | length 64.2
  Top Layer w10: Q2.2@10887.8,4660.63 R21.1@10887.8,4724.8
NetR1_1: R1.1 U2.7 | length 198.4
  Top Layer w10: U2.7@8814.57,4703.94 8814.57,4758.27 8840.16,4783.86 R1.1@8948.03,4783.86
NetR2_1: R2.1 R3.2 U1.4 | length 129.4
  Top Layer w10: U1.4@10809.84,4165.75 R3.2@10809.84,4248.43
  Top Layer w30: R3.2@10803.11,4269.93 R2.1@10803.11,4316.7
NetR9_1: R9.1 R12.2 R13.2 U5.6 | length 379.7
  Top Layer w10: R12.2@8923.72,3857.28 R9.1@8923.72,3962.32 ; R9.1@8934.78,3966.28 R13.2@9009.06,4040.55 ; U5.6@8953.94,4186.22 8953.94,4121.26 R13.2@9027.95,4047.24
NetR13_1: R13.1 R16.2 R19.2 U5.7 | length 383.5
  Top Layer w10: U5.7@9004.72,4180.71 9004.72,4155.91 R19.2@9109.84,4050.79 ; R16.2@9019.78,3859.25 R13.1@9019.78,3964.29 ; R13.1@9021.79,3965.49 R19.2@9096.06,4039.76
NetR26_1: R26.1 U8.1 | length 94.9
  Top Layer w20: R26.1@9848.03,4158.27 U8.1@9848.03,4253.15
NO1: K1.3 P3.3 | length 623.3
  Top Layer w10: P3.3@9609.45,4012.2 9709.84,4112.6 9709.84,4500.39 K1.3@9643.7,4566.54
NRST: C24.2 P5.5 R27.2 U6.3 | length 1647.5
  Top Layer w10: U6.3@9647.24,5253.94 9647.24,5422.05 ; 9648.42,5423.62 9713.78,5488.98 9877.17,5488.98 9933.86,5545.67 R27.2@10005.91,5545.67 ; R27.2@10031.89,5541.73 10685.04,6194.88 P5.5@10832.68,6194.88
RL1: R14.1 R17.1 U6.32 | length 601
  Top Layer w10: R17.1@9227.56,4555.51 R14.1@9335.43,4555.51 ; R14.1@9340.16,4554.33 9340.16,4621.65 9608.66,4890.16 U6.32@9608.66,4936.22
RS485_/RD: R18.2 U5.2 U5.3 U6.24 | length 1053.6
  Top Layer w10: R18.2@8797.24,4426.77 8905.9,4426.77 U5.3@8956.69,4477.56 ; U5.3@8946.46,4478.74 U5.2@9011.42,4478.74 ; U5.2@9005.12,4498.82 9005.12,4553.54 9024.8,4573.23 9123.23,4573.23 v1@9268.9,4718.9 ; v1@9270.87,4986.22 9285.04,5000.39 U6.24@9414.17,5000.39
  Bottom Layer w10: v1@9272.04,4718.21 v1@9272.04,4990.16
  other v1: 9270.87,4716.93 9270.87,4987.01
RS485_A: F1.2 P4.1 | length 289
  Top Layer w20: F1.2@8971.77,3417.35 9117.75,3417.35 P4.1@9218.9,3518.5
RS485_B: F2.2 P4.2 | length 129.8
  Top Layer w20: F2.2@9084.37,3593.34 P4.2@9214.17,3593.34
RS485_GND: C10.2 C11.2 D3.1 D6.2 D7.1 R5.1 R18.1 R19.1 U5.5 | length 718.7
  Top Layer w10: v1@8751.18,4494.88 R18.1@8807.87,4494.88 ; R19.1@9105.12,3966.14 v1@9161.02,3966.14
  Top Layer w20: R5.1@8517.72,4070.87 v1@8517.72,4114.57 ; R5.1@8531.89,4061.02 C11.2@8594.37,4061.02 ; D6.2@8540.52,3640.28 8540.52,4063.78 ; C11.2@8615.75,4060.24 C10.2@8615.75,4136.61
  other v1: 9161.42,3965.35 8517.32,4115.75 8884.65,4192.91 8750,4495.67
RS485_VCC: C10.1 C11.1 D3.2 R4.1 R8.2 R9.2 U5.8 | length 777.8
  Top Layer w20: C10.1@8686.15,4155.84 R8.2@8791.73,4261.42 ; C11.1@8690.55,4050.39 C10.1@8690.55,4126.77 ; C11.1@8705.19,4052.76 R4.1@8810.24,4052.76 ; D3.2@8715.35,3972.05 C11.1@8715.35,4048.43 ; R8.2@8818.5,4265.75 9018.9,4265.75 9053.54,4231.1 U5.8@9053.54,4200 ; R4.1@8830.71,4050 R9.2@8920.87,4050
SSP0_MISO: U2.2 U6.26 | length 760.9
  Top Layer w10: U2.2@8813.39,4984.25 8878.35,4919.29 9122.44,4919.29 9174.02,4867.72 9474.41,4867.72 9490.55,4883.86 U6.26@9490.55,4912.6
SSP0_MOSI: U2.5 U6.27 | length 1035.3
  Top Layer w10: U2.5@8715.75,4697.24 8715.75,4844.49 8764.96,4893.7 9113.78,4893.7 9161.81,4845.67 9481.1,4845.67 9509.84,4874.41 U6.27@9509.84,4916.14
SSP0_SCK: U2.6 U6.31 | length 1058.7
  Top Layer w10: U2.6@8766.54,4709.06 8766.54,4830.71 8808.66,4872.83 9107.87,4872.83 9153.15,4827.56 9520.87,4827.56 9588.58,4895.28 U6.31@9588.58,4946.06
SWCLK: P5.4 U6.28 | length 2176.7
  Top Layer w10: U6.28@9530.32,4937.8 9530.32,4888.98 v1@9538.19,4881.1 ; v1@9724.02,5339.37 9835.04,5450.39 9997.64,5450.39 10688.98,6141.73 P5.4@10881.5,6141.73
  Bottom Layer w10: v1@9537.1,4881.11 9700.01,4881.11 9724.41,4905.51 v1@9724.41,5335.04
  other v1: 9537.8,4880.31 9723.62,5336.22
SWDIO: P5.3 U6.38 | length 1860.7
  Top Layer w10: U6.38@9726.38,5020.08 v1@9794.49,5020.08 ; v1@9757.09,5300 9854.33,5397.24 9996.07,5397.24 10683.46,6084.65 P5.3@10928.74,6084.65
  Bottom Layer w10: v1@9757.09,5302.47 9757.09,5055.51 v1@9791.73,5020.87
  other v1: 9792.91,5020.47 9756.3,5300
U0_RXD: D5.1 J1.2 U6.46 | length 2254.5
  Top Layer w10: D5.1@8641.73,4476.38 8641.73,4535.04 8729.53,4622.84 9086.22,4622.83 9239.37,4775.98 v1@9374.41,4775.98 ; U6.46@9773.26,5177.32 9813.14,5177.32 v1@9826.77,5190.94
  Bottom Layer w10: v1@9372.54,4776.78 9711.03,4776.78 9854.73,4920.47 9854.72,5033.07 9809.06,5078.74 9809.06,5174.41 v1@9826.38,5191.73 ; v1@9830.09,5192.91 10092.52,5192.91 J1.2@10235.83,5336.22
  other v1: 9371.26,4777.17 9826.38,5190.94
U0_TXD: J1.1 U5.4 U6.47 | length 1848.5
  Top Layer w10: U5.4@8902.76,4507.09 8902.76,4576.77 8924.41,4598.43 9101.18,4598.43 9250,4747.24 9397.64,4747.24 v1@9449.41,4799.02 ; U6.47@9778.35,5196.85 v1@9798.04,5211.42
  Bottom Layer w10: v1@9450.1,4799.61 9701.58,4799.61 9835.83,4933.86 9835.83,5017.32 9785.43,5067.72 9785.43,5196.06 v1@9798.43,5209.06 ; v1@9801.74,5213.39 9999.21,5213.39 J1.1@10123.23,5337.4
  other v1: 9448.82,4798.43 9799.21,5212.2
VCC5V: 5V.1 C5.2 C7.1 C8.1 C18.1 D4.2 K1.5 L1.2 L2.2 LS1.1 R2.2 R4.2 R20.1 U3.3 | length 3928.6
  Top Layer w20: v1@8835.02,3907.74 R4.2@8835.02,3971.21 ; v1@9061.42,3906.3 9181.5,3906.3 9222.44,3947.24 D4.2@9222.44,4227.17 ; v1@10024.8,4531.5 C5.2@10075.59,4531.5 ; C5.2@10069.29,4532.28 10288.58,4532.28 C7.1@10324.41,4568.11 ; C5.2@10078.74,4527.56 U3.3@10078.74,4699.61 ; L2.2@10185.83,3986.22 C18.1@10185.83,4103.94 ; C18.1@10208.6,4109.39 10240.16,4140.95 10240.16,4531.1 ; L1.2@10443.7,4340.94 C7.1@10443.7,4562.99 ; L1.2@10506.3,4342.52 R2.2 ; R2.2@10735.04,4370.08 10774.8,4409.84 10850.39,4409.84 R20.1@10888.58,4448.03 ; R20.1@10887.4,4484.65 LS1.1@11165.35,4484.65 ; 5V.1@11175.98,4216.93 LS1.1@11175.98,4494.88
  Bottom Layer w20: v1@8829.9,3906.91 v1@9054.33,3906.91 ; v1@9218.5,4160.63 9374.41,4316.54 9509.05,4316.54 K1.5@9650.39,4457.87 ; K1.5@9653.75,4465.26 9887.7,4465.26 9954.33,4531.89 v1@10022.83,4531.89
  other v1: 8834.65,3906.3 9055.91,3907.09 9222.05,4164.17 10026.38,4531.89
VCC12V: 12V.1 C3.1 C4.2 D1.2 U1.2 U1.3 | length 803
  Top Layer w10: U1.2@10764.57,4076.38 10824.02,4076.38
  Top Layer w30: C3.1@10559.06,3953.15 10765.35,3953.15 10818.11,4005.91 U1.3@10818.11,4065.35
  Top Layer w40: D1.2@10512.99,3644.88 12V.1@10631.1,3644.88 ; D1.2@10516.93,3651.18 C3.1@10516.93,3936.22
VCC_SIG: C17.1 L2.1 P6.1 | length 373.8
  Top Layer w20: P6.1@9829.73,3995.74 9880.2,3945.28 L2.1@10064.96,3945.28 ; L2.1@10085.43,4000 C17.1@10085.43,4117.72
VDD33: 3.3V.1 C2.2 C6.2 C9.1 C12.1 C13.1 C14.2 C15.1 C16.1 C19.1 C20.1 C21.2 C22.2 P2.1 P5.1 R1.2 R6.2 R7.2 R10.2 R11.2 R23.2 R24.1 R25.1 R27.1 U2.8 U3.2 U3.4 U4.8 U6.8 U6.33 U6.43 U6.44 U7.2 | length 2553.5
  Top Layer w10: R23.2@8180.41,5190.55 v1@8253.94,5190.55 ; U2.8@8871.26,4694.88 C2.2@8947.64,4694.88 ; v1@8914.17,4650.39 8914.17,4694.49 ; v1@8967.72,6361.42 9020.47,6361.42 ; R7.2@9020.08,6312.99 R6.2@9020.08,6401.57 ; R1.2@9033.07,4797.64 v1@9033.07,4841.73 ; C12.1@9183.46,6142.52 v1@9183.46,6199.61 ; U6.8@9549.21,5273.62 9549.21,5362.2 v1@9565.75,5378.74 ; v1@9610.24,4648.82 9610.24,4853.94 9627.56,4871.26 U6.33@9627.56,4925.2 ; 9707.09,5116.93 9707.09,5137.01 ; U6.44@9748.43,5137.01 v1@10038.98,5137.01 ; R25.1@9831.1,5612.57 v1@9831.1,5669.68 ; R27.1@10014.17,5625.98 v1@10014.17,5669.68 ; 10246.85,6107.48 v1@10303.54,6107.48 ; R10.2@10247.64,6064.17 R11.2@10247.64,6154.72
  Top Layer w20: v1@8048.55,5217.33 U7.2@8196.59,5473.73 ; R24.1@9935.43,4681.89 v1(9977.17,4681.89) ; v1@10025.59,4792.13 U3.2@10067.32,4792.13
  Top Layer w30: C14.2@9101.57,5901.97 U4.8@9338.98,5901.97 ; C14.2@9107.09,5898.03 9107.09,6124.41 C12.1@9139.76,6157.09 ; U3.4@10307.48,4803.15 C9.1@10444.09,4803.15 ; C9.1@10437.4,4819.29 v1@10437.4,4955.91
  other v1: 9610.63,4639.76 8914.57,4648.82 10024.02,4791.73 9033.07,4842.13 10437.8,4959.45 10037.8,5137.01 8256.69,5189.76 8046.06,5212.99 9566.93,5380.71 9830.32,5668.9 10012.99,5671.65 10301.18,6107.48 9182.68,6205.12 8967.32,6360.63
WIFI_NPD: R7.1 U4.3 U6.10 | length 1401.9
  Top Layer w10: R7.1@9090.94,6303.94 U4.3@9337.4,6303.94 ; v1@9254.72,5826.38 9510.24,5570.87 U6.10@9510.24,5257.87
  Bottom Layer w10: v1@9251.97,5821.65 v1@9251.97,6302.76
  other v1: 9253.54,5827.17 9253.54,6305.51
WIFI_NRST: R6.1 U4.1 U6.11 | length 1508
  Top Layer w10: R6.1@9105.12,6424.41 9288.19,6424.41 U4.1@9325.2,6461.42 ; v1@9221.65,5827.17 9490.94,5557.88 U6.11@9490.95,5255.12
  Bottom Layer w10: v1@9220.47,5831.89 v1@9220.47,6420.87
  other v1: 9221.26,5826.38 9221.26,6424.02
WIFI_RXD: U4.21 U6.9 | length 1573.5
  Top Layer w10: U6.9@9530.71,5285.04 9530.71,5762.6 9586.22,5818.11 10002.76,5818.11 10055.12,5870.47 10055.12,6336.62 U4.21@10012.2,6379.53
WIFI_TXD: U4.22 U6.14 | length 2006.8
  Top Layer w10: v1@9325.59,5401.18 9325.59,5227.16 9356.69,5196.06 U6.14@9413.78,5196.06 ; v1@9555.91,5461.42 9555.9,5752.75 9596.85,5793.7 10014.57,5793.7 10083.47,5862.6 10083.46,6374.8 U4.22@10014.17,6444.09
  Bottom Layer w10: v1@9321.74,5397.56 9354.11,5429.92 9527.56,5429.92 v1@9554.33,5456.69
  other v1: 9324.41,5399.61 9555.51,5459.84
pads on no net: U4.2 U4.4 U4.5 U4.6 U4.7 U4.19 U4.20 U6.1 U6.2 U6.6 U6.7 U6.12 U6.13 U6.15 U6.16 U6.18 U6.19 U6.20 U6.21 U6.29 U6.30 U6.35 U6.42 U7.3 U7.4 U7.6 U7.7 U7.8 U7.9 U7.10 U7.11 U7.12 U7.13 U7.14 U7.15 U7.18

## Polygon pours and split planes (outlines as drawn)
VDD33 on VCC "Top Layer-No Net" (hatched 90Degree grid 20 track 20, remove dead copper, pour order 1000): 7725.86,6867.7 7731.37,6862.19 7731.37,3255.1 11643.97,3255.1 11649.48,3260.61 11654.99,3266.12 11654.99,6862.19
GND on GND "Top Layer-No Net" (hatched 90Degree grid 20 track 20, remove dead copper, pour order 1001): 7525.44,6857.95 7536.46,6846.93 7536.46,3185.12 11726.62,3185.12 11732.13,3179.61 11732.13,6863.46
RS485_GND on Bottom Layer "Top Layer-No Net" (solid, remove dead copper): 8529.53,4522.05 8531.5,4520.08 8531.5,4166.14 8529.53,4166.14 8470.47,4107.09 8468.9,4105.51 8468.9,3721.65 8468.9,3720.08 8612.99,3575.98 8644.49,3544.49 8979.53,3544.49 8979.53,3550 9128.74,3699.21 9170.47,3740.94 9170.47,4138.58 9170.47,4517.32 9171.65,4518.5

## Keep-outs
Keep-Out Layer:
  circle w2.5: c-4053.5,-2766.5 r1.25
  circle w5: c11012.71,4261.76 r59.06
  circle w5: c8421.45,4261.76 r59.06
  lines w5: 9150,6815 10275,6815 ; 9159.84,6815.53 ccw(c9717.08,5009.79) 7993.04,4235.91 cw(c7971.13,4106.74) 8087.51,4166.93 ccw(c9717.08,5009.79) 8272.49,3878.82 cw(c8170.37,3805.04) 8291.25,3769.54 ccw(c9717.08,5009.79) 8903.85,3303.95 9360.67,3305 9360.67,3835.16 9715,3835.16 10069.33,3835.16 10069.33,3303.95 ; 10070,3303.95 10530.31,3303.95 ccw(c9717.08,5009.79) 11249.3,3903.66 cw(c11372.12,3949.28) 11261.81,4019.96 ccw(c9717.08,5009.79) 11418.82,4324.22 cw(c11533.78,4272.68) 11504.08,4395.11 ccw(c9717.08,5009.79) 10265.94,6818.09 ; 8177.89,4872.76 cw(c8344.56,4887.6) 8511.22,4902.43 ccw(c9717.08,5009.79) 8524.84,4799.56 cw(c8360.06,4770.51) 8195.28,4741.45 cw(c9717.08,5009.79) 8177.89,4872.76 ; 10886.94,5321.34 cw(c9717.08,5009.79) 10909.32,5220.01 ccw(c11074.1,5249.07) 11238.88,5278.12 ccw(c9717.08,5009.79) 11210.31,5407.46 ccw(c11048.62,5364.4) 10886.94,5321.34
  lines w10: 9391.93,6764.03 9391.93,6556.35 9953.54,6556.35 9953.54,6762.6 9393.32,6762.6 ; 8018.98,5567.43 8222.3,5919.59 8314.29,5866.47 8110.98,5514.32 8018.98,5567.43

## Other copper
Top Layer:
  rectangle net GND: 9470.87,5002.76 9683.07,5209.45
  rectangle net GND: 9427.56,5881.89 9918.11,6461.81
  region net GND: 8529.64,5344.17 8666.46,5581.13 8304.63,5790.03 8167.82,5553.07

## Silkscreen, mask and mechanical layers (free items; w line width, h text height)
Top Overlay:
  text "GND" at 10352.36,5409.84 h30 r90
  text "RXD" at 10246.46,5408.27 h30 r90
  text "TXD" at 10137.01,5404.72 h30 r90
  text "WG-JW-MB V1.0" at 8856.3,5387.4 h30
  text "2016.07.12" at 8912.6,5327.56 h30
  text "IN" at 9916.14,3855.91 h30
  text "COM" at 9794.09,3854.72 h30
  text "NO" at 9616.93,3852.36 h30
  text "NC" at 9421.26,3851.18 h30
  text "COM" at 9504.33,3851.18 h30
Mechanical 1:
  circle w5.98: c-17.81,-71.99 r168.08
Mechanical 6:
  circle w2.5: c234.12,1873.68 r1.25
  circle w2.5: c-462.36,1830.92 r1.25

## Text inside footprints (layer, text, board x,y; h text height)
C1: Mechanical 7 "2" at 10633.62,4152.75 h25 r90; Mechanical 7 "1" at 10633.62,4066.15 h25 r90
C2: Mechanical 7 "2" at 8953.94,4703.31 h25 r180; Mechanical 7 "1" at 9040.54,4703.31 h25 r180
C19: Mechanical 7 "2" at 9679.91,4682.91 h25; Mechanical 7 "1" at 9593.32,4682.91 h25
C22: Mechanical 7 "2" at 9992.68,5148.02 h25 r90; Mechanical 7 "1" at 9992.68,5061.43 h25 r90
C25: Mechanical 7 "1" at 9733.31,5623.61 h25 r270; Mechanical 7 "2" at 9733.31,5537.02 h25 r270
D1: Mechanical 8 "1" at 10514.17,3477.06 h25 r90; Mechanical 8 "2" at 10514.17,3637.06 h25 r90; Mechanical 11 "4.06" at 10409.17,3607.06 h45 r90; Mechanical 11 "160.00" at 10409.17,3442.06 h45 r90
D2: Mechanical 8 "1" at 10317.61,4123.62 h25; Mechanical 8 "2" at 10477.61,4123.62 h25; Mechanical 11 "4.06" at 10447.61,4228.62 h45; Mechanical 11 "160.00" at 10282.61,4228.62 h45
D3: Mechanical 8 "1" at 8563.09,3899.39 h25 r90; Mechanical 8 "2" at 8764.09,3899.39 h25 r90; Mechanical 9 "SMAJ6A" at 8628.09,3882.39 h25
D4: Mechanical 8 "2" at 9231.32,4221.65 h25 r180; Mechanical 8 "1" at 9350.92,4221.65 h25 r180
D5: Mechanical 8 "2" at 8640.95,4356.52 h25 r270; Mechanical 8 "1" at 8640.94,4476.12 h25 r270
D6: Mechanical 8 "1" at 8795.41,3651.1 h25 r180; Mechanical 8 "2" at 8590.41,3651.1 h25 r180
D7: Mechanical 8 "1" at 8492.78,3779.61 h25; Mechanical 8 "2" at 8697.78,3779.61 h25
L1: Mechanical 8 "2" at 10540.16,4360.43 h25 r180; Mechanical 8 "1" at 10540.16,4250.43 h25 r180
L2: Mechanical 8 "2" at 10214.37,3935.43 h25 r90; Mechanical 8 "1" at 10104.37,3935.43 h25 r90
Q1: Mechanical 8 "3" at 9333.09,4362.36 h25 r270; Mechanical 8 "1" at 9243.29,4402.56 h25 r270; Mechanical 8 "2" at 9243.29,4322.16 h25 r270
Q2: Mechanical 8 "2" at 10813.5,4656.32 h25 r180; Mechanical 8 "1" at 10893.9,4656.32 h25 r180; Mechanical 8 "3" at 10853.7,4566.52 h25 r180
R1: Mechanical 7 "1" at 8953.95,4777.8 h25; Mechanical 7 "2" at 9040.54,4777.8 h25
R2: Mechanical 7 "1" at 10809.05,4352.52 h25 r180; Mechanical 7 "2" at 10722.45,4352.52 h25 r180
R3: Mechanical 7 "2" at 10809.05,4241.18 h25; Mechanical 7 "1" at 10722.45,4241.18 h25
R4: Mechanical 7 "1" at 8821.5,4046.05 h25 r270; Mechanical 7 "2" at 8821.5,3959.46 h25 r270
R5: Mechanical 7 "2" at 8433.47,4071.02 h25 r180; Mechanical 7 "1" at 8520.07,4071.02 h25 r180
R6: Mechanical 7 "1" at 9101.17,6419.45 h25 r180; Mechanical 7 "2" at 9014.57,6419.45 h25 r180
R7: Mechanical 7 "1" at 9100.78,6326.14 h25 r180; Mechanical 7 "2" at 9014.18,6326.14 h25 r180
R8: Mechanical 7 "2" at 8795.12,4244.5 h25 r270; Mechanical 7 "1" at 8795.12,4331.09 h25 r270
R9: Mechanical 7 "2" at 8935.98,4047.63 h25 r90; Mechanical 7 "1" at 8935.98,3961.03 h25 r90
R10: Mechanical 7 "1" at 10165.76,6052.99 h25; Mechanical 7 "2" at 10252.35,6052.99 h25
R11: Mechanical 7 "2" at 10252.35,6141.97 h25; Mechanical 7 "1" at 10165.76,6141.97 h25
R12: Mechanical 7 "1" at 8948.58,3763 h25 r90; Mechanical 7 "2" at 8948.58,3849.6 h25 r90
R13: Mechanical 7 "1" at 9025.01,3960.44 h25 r90; Mechanical 7 "2" at 9025.01,4047.04 h25 r90
R14: Mechanical 7 "2" at 9319.92,4473.63 h25 r270; Mechanical 7 "1" at 9319.92,4560.23 h25 r270
R15: Mechanical 7 "2" at 10165.76,5981.26 h25 r180; Mechanical 7 "1" at 10252.35,5981.26 h25 r180
R16: Mechanical 7 "1" at 9038.35,3761.03 h25 r90; Mechanical 7 "2" at 9038.35,3847.63 h25 r90
R17: Mechanical 7 "2" at 9223.07,4473.63 h25 r270; Mechanical 7 "1" at 9223.07,4560.23 h25 r270
R18: Mechanical 7 "2" at 8795.12,4413.39 h25 r270; Mechanical 7 "1" at 8795.12,4499.99 h25 r270
R19: Mechanical 7 "2" at 9115.12,4047.63 h25 r90; Mechanical 7 "1" at 9115.12,3961.03 h25 r90
R20: Mechanical 7 "2" at 10801.19,4483.62 h25 r180; Mechanical 7 "1" at 10887.79,4483.62 h25 r180
R21: Mechanical 7 "1" at 10884.24,4759.21 h25 r180; Mechanical 7 "2" at 10797.65,4759.21 h25 r180
R22: Mechanical 7 "1" at 10884.24,4850.55 h25 r180; Mechanical 7 "2" at 10797.65,4850.55 h25 r180
R23: Mechanical 7 "2" at 8186.23,5195.45 h25 r240; Mechanical 7 "1" at 8229.52,5270.45 h25 r240
R24: Mechanical 7 "2" at 9844.89,4691.1 h25 r180; Mechanical 7 "1" at 9931.49,4691.1 h25 r180
R25: Mechanical 7 "2" at 9823.07,5535.05 h25 r270; Mechanical 7 "1" at 9823.07,5621.65 h25 r270
R26: Mechanical 7 "2" at 9928.73,4146.69 h25; Mechanical 7 "1" at 9842.13,4146.69 h25
R27: Mechanical 7 "2" at 10005.35,5539.77 h25 r270; Mechanical 7 "1" at 10005.35,5626.37 h25 r270
U1: Mechanical 8 "4" at 10739.83,4160.45 h25; Mechanical 8 "1" at 10665.83,4058.45 h25; Mechanical 8 "2" at 10702.83,4058.45 h25; Mechanical 8 "3" at 10739.83,4058.45 h25
U3: Mechanical 10 "2" at 10082.25,4802.52 h25 r270; Mechanical 10 "4" at 10312.05,4802.52 h25 r270; Mechanical 10 "3" at 10082.25,4712.32 h25 r270; Mechanical 10 "1" at 10082.25,4892.72 h25 r270
U6: Mechanical 8 "32" at 9608.64,4963.27 h25 r270; Mechanical 8 "39" at 9743.74,5059.37 h25 r270; Mechanical 8 "12" at 9470.84,5293.27 h25 r270; Mechanical 8 "35" at 9667.74,4963.27 h25 r270; Mechanical 8 "1" at 9686.64,5283.27 h25 r270; Mechanical 8 "4" at 9627.54,5283.27 h25 r270; Mechanical 8 "43" at 9743.74,5138.07 h25 r270; Mechanical 8 "33" at 9627.54,4963.27 h25 r270; Mechanical 8 "30" at 9568.94,4963.27 h25 r270; Mechanical 8 "36" at 9686.64,4963.27 h25 r270; Mechanical 8 "28" at 9529.94,4963.27 h25 r270; Mechanical 8 "21" at 9413.74,5079.47 h25 r270; Mechanical 8 "18" at 9413.74,5138.07 h25 r270; Mechanical 8 "24" at 9413.74,5020.37 h25 r270; Mechanical 8 "23" at 9413.74,5040.07 h25 r270; Mechanical 8 "9" at 9529.94,5283.27 h25 r270; Mechanical 8 "14" at 9413.74,5216.47 h25 r270; Mechanical 8 "22" at 9413.74,5059.37 h25 r270; Mechanical 8 "8" at 9549.64,5283.27 h25 r270; Mechanical 8 "44" at 9743.74,5157.37 h25 r270; Mechanical 8 "34" at 9647.64,4963.27 h25 r270; Mechanical 8 "5" at 9608.64,5283.27 h25 r270; Mechanical 8 "41" at 9743.74,5098.37 h25 r270; Mechanical 8 "40" at 9743.74,5079.47 h25 r270; Mechanical 8 "3" at 9647.64,5283.27 h25 r270; Mechanical 8 "38" at 9743.74,5040.07 h25 r270; Mechanical 8 "29" at 9549.64,4963.27 h25 r270; Mechanical 8 "7" at 9568.94,5283.27 h25 r270; Mechanical 8 "6" at 9588.54,5283.27 h25 r270; Mechanical 8 "17" at 9413.74,5157.37 h25 r270; Mechanical 8 "10" at 9509.84,5293.27 h25 r270; Mechanical 8 "11" at 9490.54,5293.27 h25 r270; Mechanical 8 "19" at 9413.74,5118.47 h25 r270; Mechanical 8 "20" at 9413.74,5098.37 h25 r270; Mechanical 8 "13" at 9413.74,5236.17 h25 r270; Mechanical 8 "46" at 9743.74,5197.17 h25 r270; Mechanical 8 "16" at 9413.74,5177.07 h25 r270; Mechanical 8 "45" at 9743.74,5177.07 h25 r270; Mechanical 8 "47" at 9743.74,5216.47 h25 r270; Mechanical 8 "37" at 9743.74,5020.37 h25 r270; Mechanical 8 "42" at 9743.74,5118.47 h25 r270; Mechanical 8 "15" at 9413.74,5197.17 h25 r270; Mechanical 8 "31" at 9588.54,4963.27 h25 r270; Mechanical 8 "2" at 9667.74,5283.27 h25 r270; Mechanical 8 "48" at 9743.74,5236.17 h25 r270; Mechanical 8 "25" at 9470.84,4963.27 h25 r270; Mechanical 8 "26" at 9490.54,4963.27 h25 r270; Mechanical 8 "27" at 9509.84,4963.27 h25 r270